# Altium PCB Altium_PCB_v03_RAM_ROM_4Plane.pcbdoc
Units mil, origin at the board's own origin, x right, y up, seen from the top; angles counter-clockwise.
Board outline 6299.21 x 6299.21 mil, 4 copper layers (Top Layer, GROUND, 5V, Bottom Layer); 19 components, 42 nets, 129 pads, 0 vias.
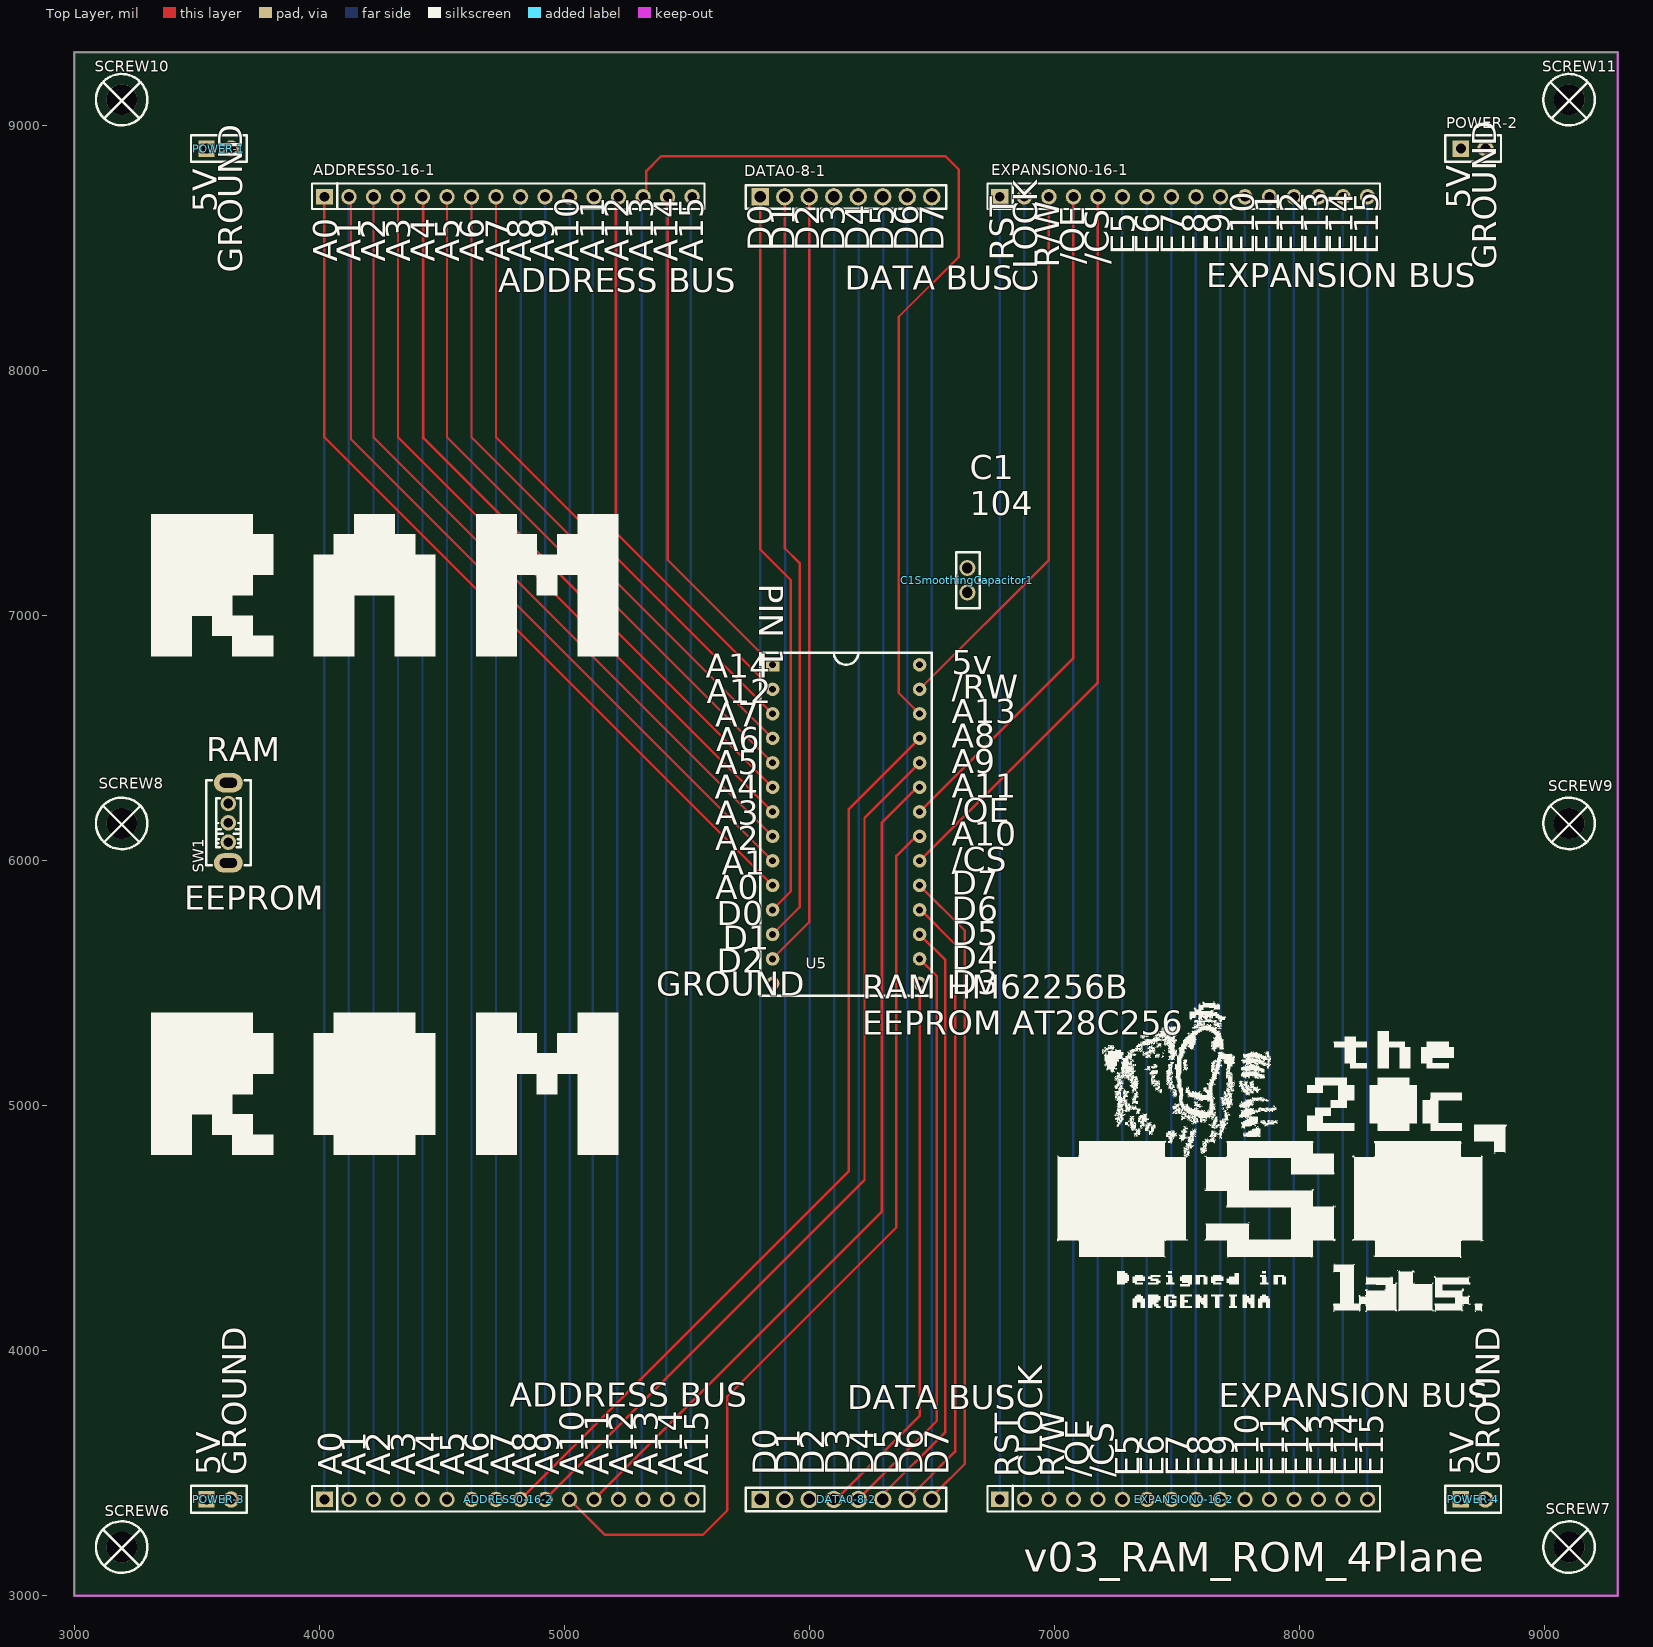
[diagram p0: Top Layer view]
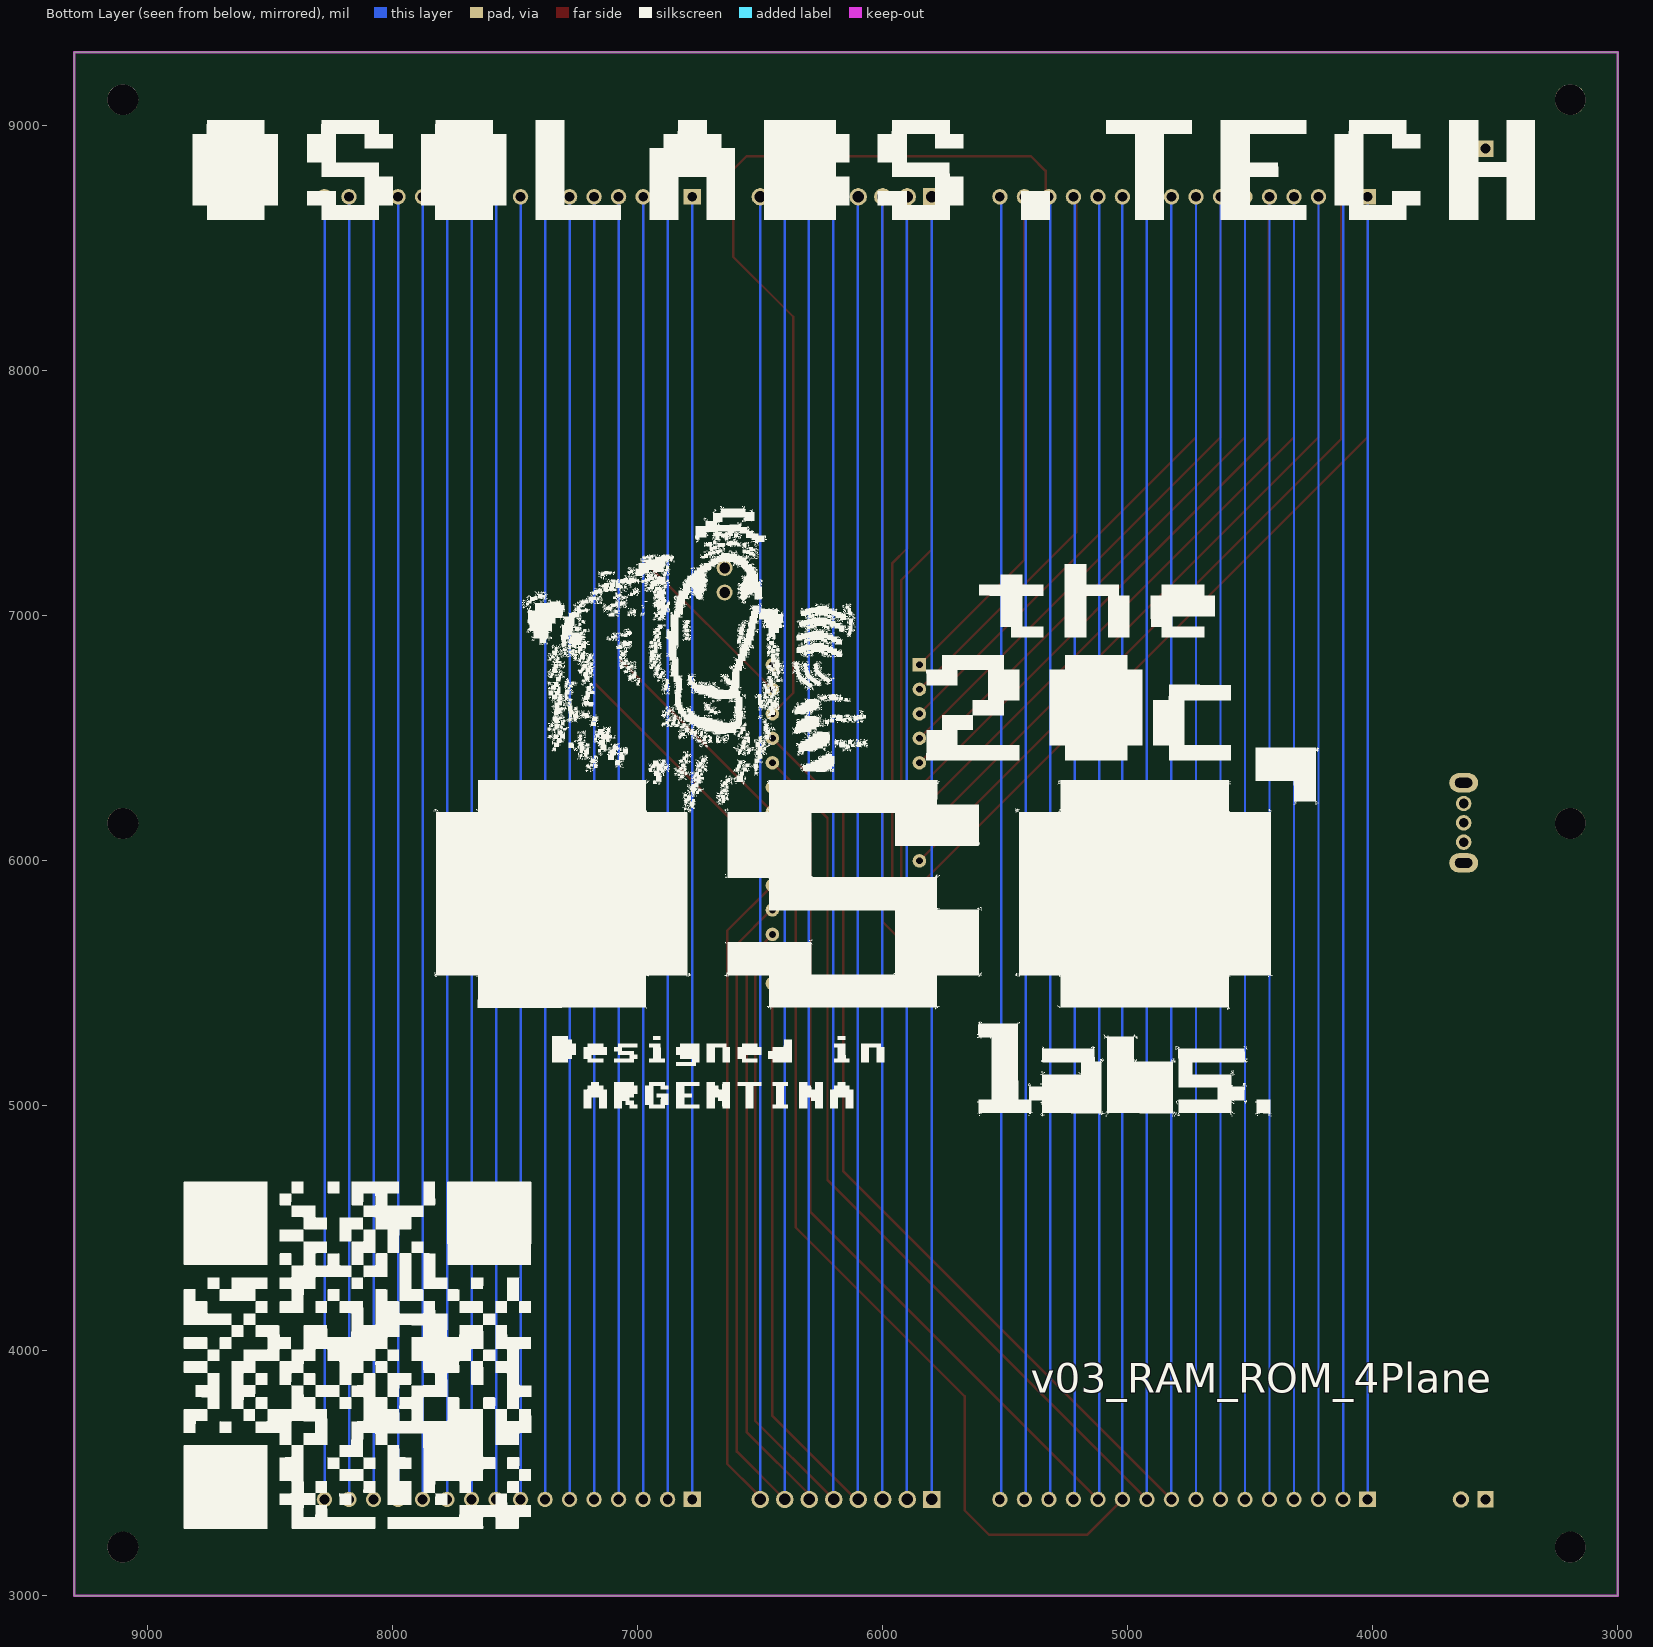
[diagram p1: Bottom Layer view, seen from below]
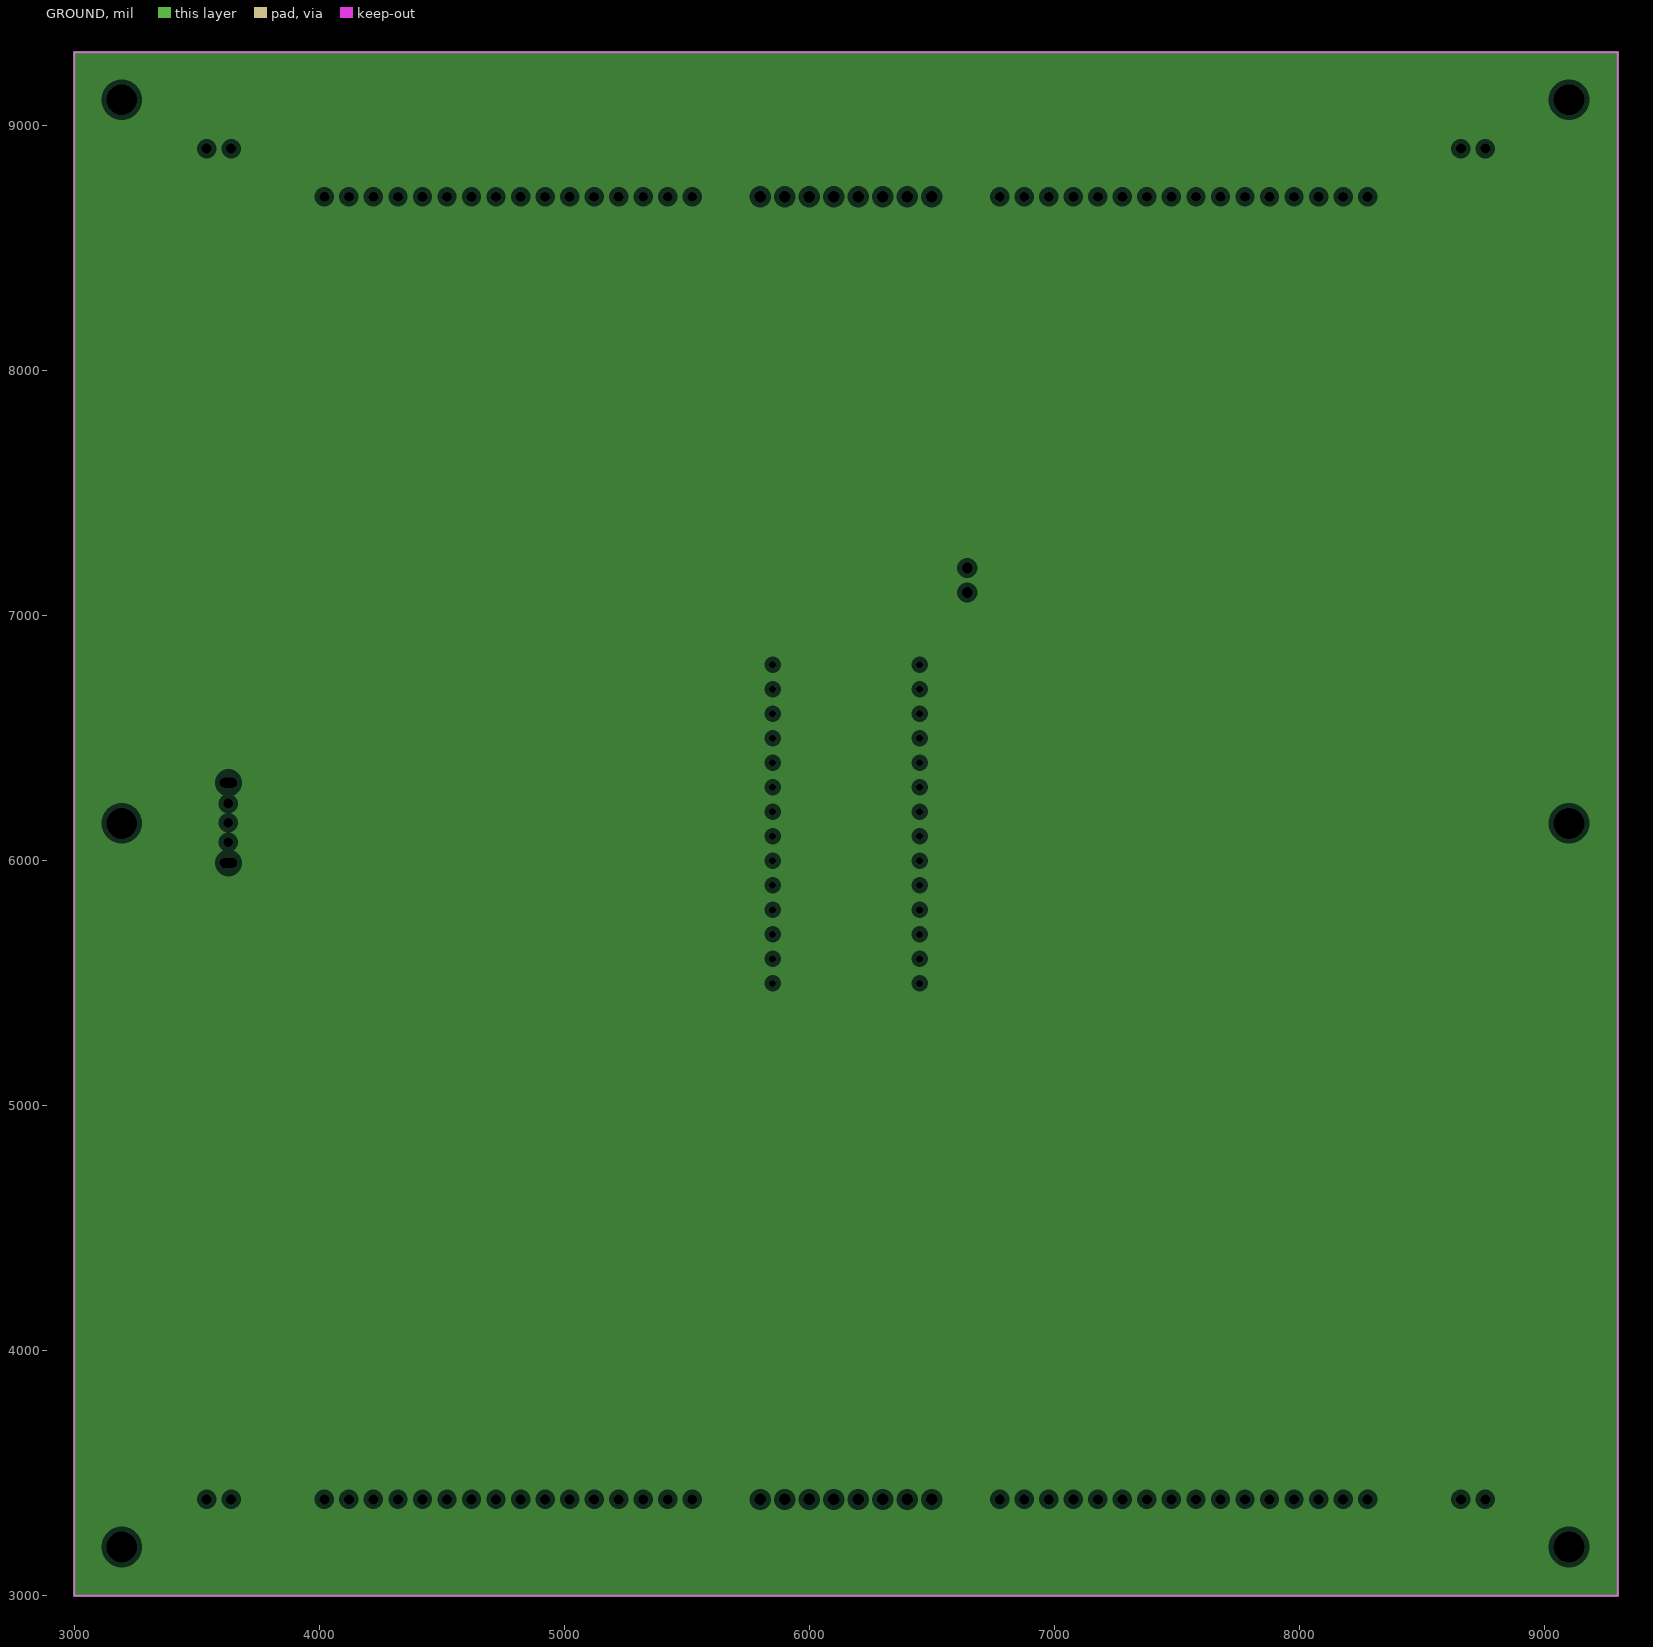
[diagram p2: GROUND, clearances drawn from the general rule]
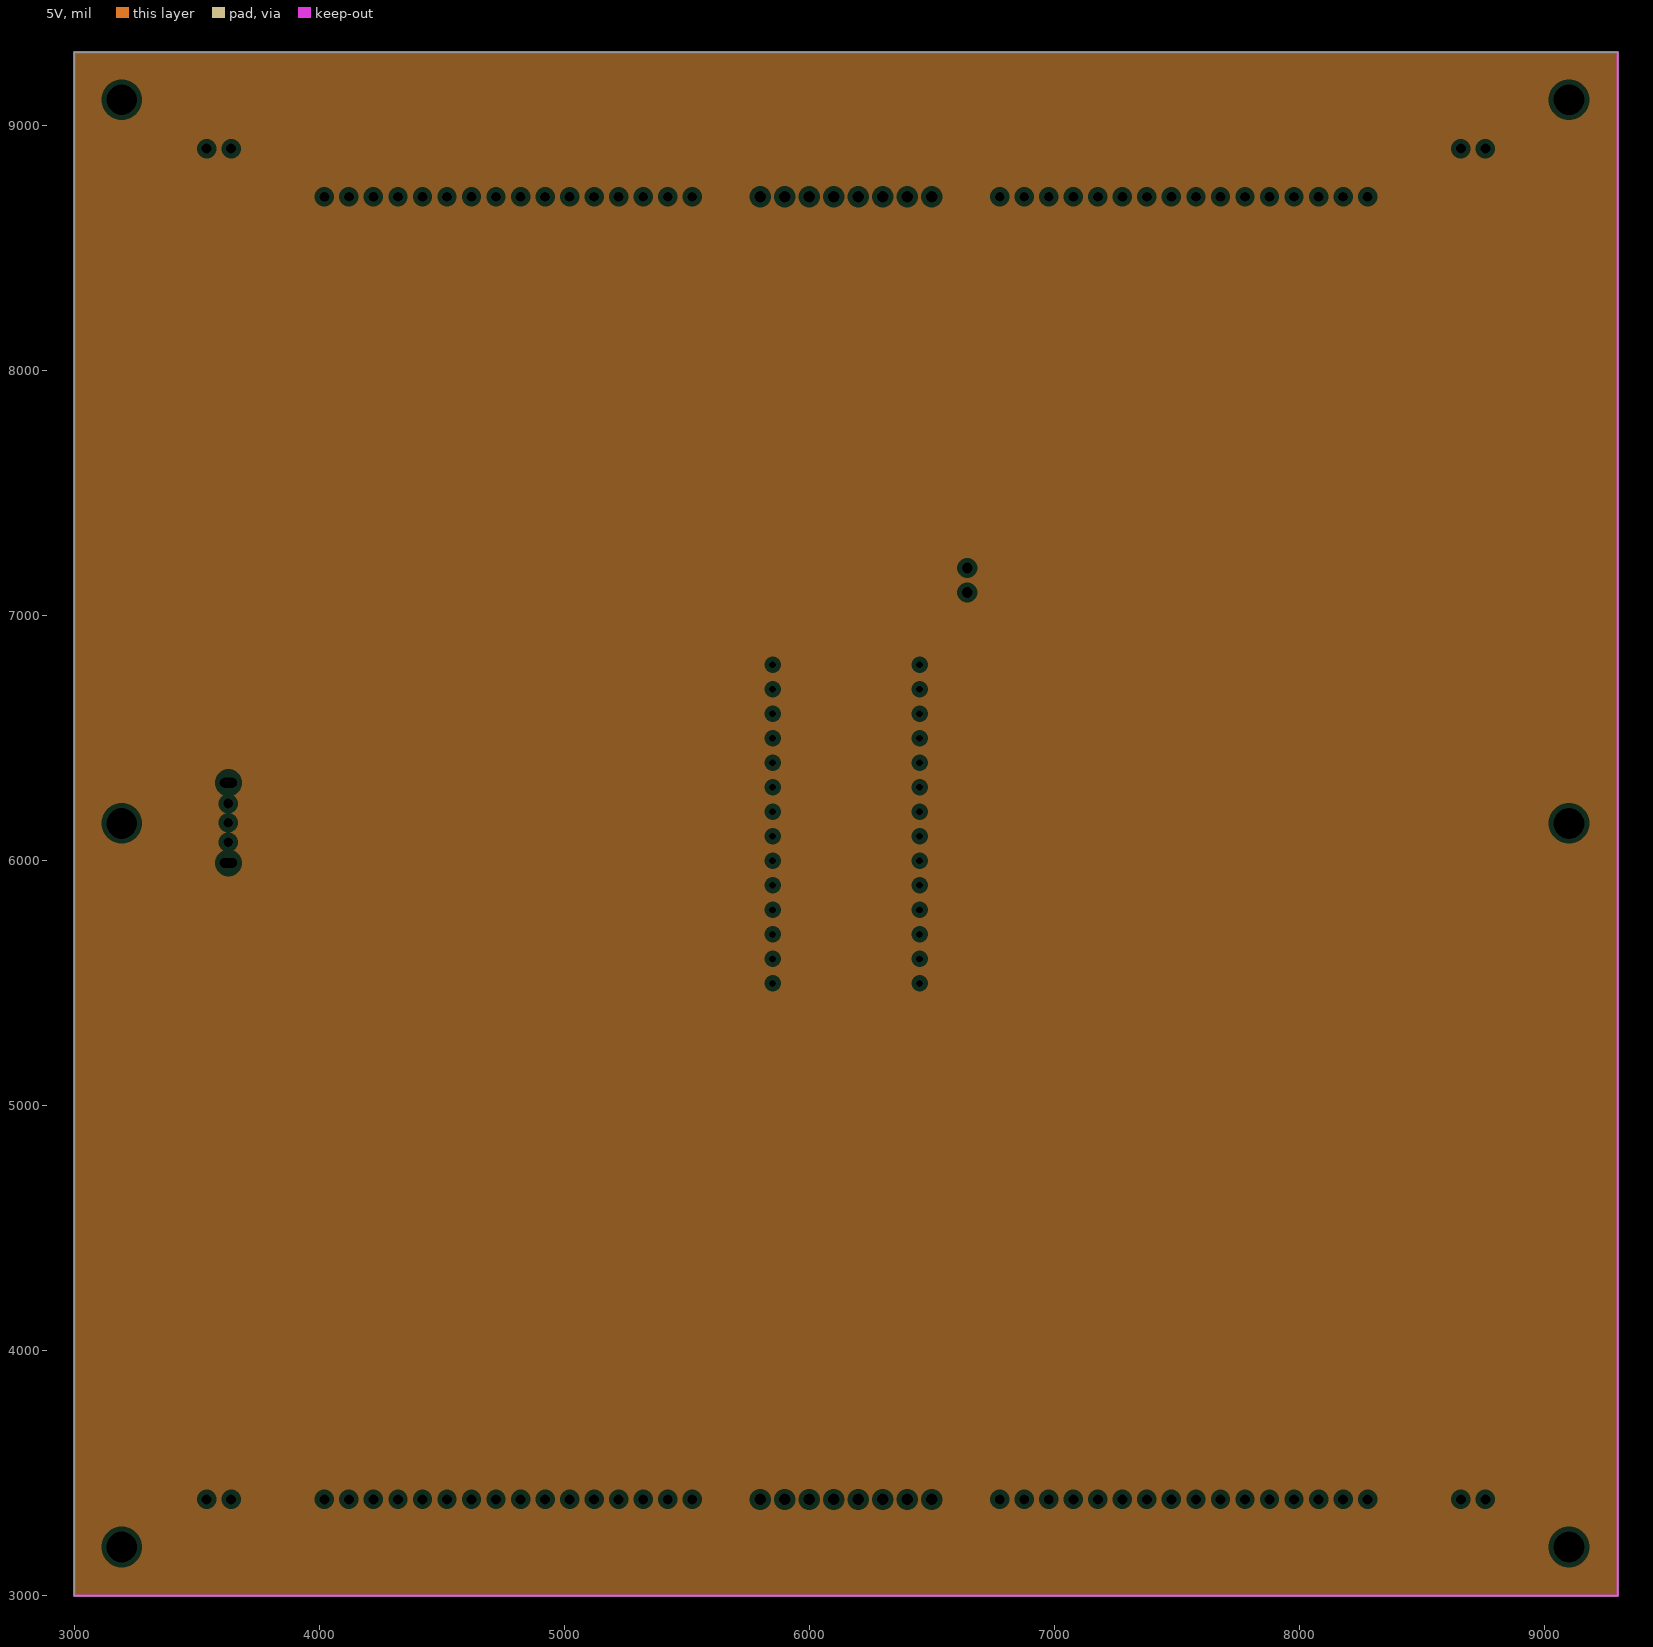
[diagram p3: 5V, clearances drawn from the general rule]

## Layer stack, top to bottom
Top Layer: signal copper (thickness not stored)
Dielectric: dielectric 12.6, FR-4, Dk 4.8
GROUND: plane copper (thickness not stored)
Dielectric: dielectric 12.6, FR-4, Dk 4.8
5V: plane copper (thickness not stored)
Dielectric: dielectric 12.6, FR-4, Dk 4.8
Bottom Layer: signal copper (thickness not stored)

## Board outline
3000,9299.21 9299.21,9299.21 9299.21,3000 3000,3000

## Design rules (kind name [scope] priority, off if disabled: settings)
BoardOutlineClearance copperThickness1oz [All] p0: genericclearance=10 ignorepadtopadclearanceinfootprint=FALSE except(0: Arc-SplitContinuation Track-SplitContinuation SMDPad-SplitContinuation THPad-SplitContinuation Via-SplitContinuation Fill-SplitContinuation Poly-SplitContinuation Region-SplitContinuation Text-SplitContinuation; 6: SMDPad-CutoutEdge THPad-CutoutEdge Via-CutoutEdge Fill-CutoutEdge Region-CutoutEdge; 11.8: Track-OutlineEdge SMDPad-OutlineEdge THPad-OutlineEdge Via-OutlineEdge Fill-OutlineEdge Region-OutlineEdge Poly-OutlineEdge Text-OutlineEdge Track-CutoutEdge)
BoardOutlineClearance copperThickness2oz [All] p0: genericclearance=10 ignorepadtopadclearanceinfootprint=FALSE except(0: Arc-SplitContinuation Track-SplitContinuation SMDPad-SplitContinuation THPad-SplitContinuation Via-SplitContinuation Fill-SplitContinuation Poly-SplitContinuation Region-SplitContinuation Text-SplitContinuation; 6: SMDPad-CutoutEdge THPad-CutoutEdge Via-CutoutEdge Fill-CutoutEdge Region-CutoutEdge; 11.8: Track-OutlineEdge SMDPad-OutlineEdge THPad-OutlineEdge Via-OutlineEdge Fill-OutlineEdge Region-OutlineEdge Poly-OutlineEdge Text-OutlineEdge Track-CutoutEdge)
Clearance copperThickness1oz [(InNet('A0') OR InNet('A1') OR InNet('A2') OR InNet('A3') OR InNet('A4') OR InNet('A5') OR InNet('A6') OR InNet('A7') OR InNet('A8') OR InNet('A9') OR InNet('A10') OR InNet('A11') OR InNet('A12') OR InNet('A13') OR InNet('A14') OR InNet('A15') OR InNet('RST') OR InNet('CLOCK') OR InNet('RW') OR InNet('OE') OR InNet('CS') OR InNet('E5') OR InNet('E6') OR InNet('E7') OR InNet('E8') OR InNet('E9') OR InNet('E10') OR InNet('E11') OR InNet('E12') OR InNet('E13') OR InNet('E14') OR InNet('E15') OR InNet('5V') OR InNet('GROUND') OR InNet('D0') OR InNet('D1') OR InNet('D2') OR InNet('D3') OR InNet('D4') OR InNet('D5') OR InNet('D6') OR InNet('D7'))] p1: gap=7 ignorepadtopadclearanceinfootprint=FALSE except(4: Track-Track; 6: Track-SMDPad SMDPad-SMDPad Track-THPad SMDPad-THPad THPad-THPad Track-Via SMDPad-Via THPad-Via Via-Via Track-Fill SMDPad-Fill THPad-Fill Via-Fill Fill-Fill SMDPad-Region THPad-Region Via-Region Fill-Region Region-Region Track-Poly SMDPad-Poly THPad-Poly Via-Poly Fill-Poly Poly-Poly Track-Text SMDPad-Text THPad-Text Via-Text Fill-Text Region-Text Poly-Text Text-Text Track-Hole SMDPad-Hole THPad-Hole Via-Hole Fill-Hole Region-Hole Poly-Hole Text-Hole; 11.8: Track-Region Region-Poly Track-Sheet SMDPad-Sheet THPad-Sheet Via-Sheet Fill-Sheet Region-Sheet Poly-Sheet Text-Sheet Sheet-Hole)
Clearance copperThickness2oz [All] p1: gap=7 ignorepadtopadclearanceinfootprint=FALSE except(6: Track-SMDPad SMDPad-SMDPad Track-THPad SMDPad-THPad THPad-THPad Track-Via SMDPad-Via THPad-Via Via-Via Track-Fill SMDPad-Fill THPad-Fill Via-Fill Fill-Fill SMDPad-Region THPad-Region Via-Region Fill-Region Region-Region Track-Poly SMDPad-Poly THPad-Poly Via-Poly Fill-Poly Poly-Poly Track-Text SMDPad-Text THPad-Text Via-Text Fill-Text Region-Text Poly-Text Text-Text Track-Hole SMDPad-Hole THPad-Hole Via-Hole Fill-Hole Region-Hole Poly-Hole Text-Hole; 8: Track-Track; 11.8: Track-Region Region-Poly Track-Sheet SMDPad-Sheet THPad-Sheet Via-Sheet Fill-Sheet Region-Sheet Poly-Sheet Text-Sheet Sheet-Hole)
DiffPairsRouting differentialPair [All] p1: maxuncoupledlength=10 minlimit=6 maxlimit=6 mostfreqgap=6 toplayer_minwidth=5 toplayer_prefwidth=10 toplayer_maxwidth=100 bottomlayer_minwidth=5 bottomlayer_prefwidth=10 bottomlayer_maxwidth=100
PasteMaskExpansion pasteMaskExpansion [All] p1: expansion=0
PlaneConnect innerPlane [All] p1: planeconnectstyle=Relief reliefexpansion=20 reliefentries=4 reliefconductorwidth=10 reliefairgap=10
PolygonConnect copperRegion [All] p1: connectstyle=Relief reliefentries=4 reliefconductorwidth=10 polygonreliefangle="90 Angle" airgapwidth=10
RoutingVias viaSize [All] p1: viastyle="Through Hole" holewidth=12.0078 minholewidth=11.811 maxholewidth=248.0314 width=24.0158 minwidth=19.685 maxwidth=393.7008
SolderMaskExpansion solderMaskExpansion [All] p1: useseparateexpansions=TRUE expansion=2 expansionbottom=2
Width copperThickness1oz [All] p1: maxlimit=100 minlimit=5 preferedwidth=10
Width copperThickness2oz [All] p1: maxlimit=100 minlimit=8 preferedwidth=10

## Components (designator, comment, footprint, x,y, rotation, side; value= is the part's Value field where it differs from the comment)
ADDRESS0-16-1 "PM254-1-16-Z-8.5" HDR-TH_16P-P2.54-V-F-A 4771.65,8708.66 r0 top
ADDRESS0-16-2 "PM254-1-16-Z-8.5" HDR-TH_16P-P2.54-V-F-A 4771.65,3393.7 r0 top
C1SmoothingCapacitor1 "CC1H104ZA1ED3F5P1100" CAP-TH_L5.8-W2.4-P2.54-D0.6 6645,7144.21 r90 top
DATA0-8-1 "2.54-1*8P母环保" HDR-TH_8P-P2.54-V-F-1 6149.61,8708.66 r0 top
DATA0-8-2 "2.54-1*8P母环保" HDR-TH_8P-P2.54-V-F-1 6149.61,3393.7 r0 top
EXPANSION0-16-1 "PM254-1-16-Z-8.5" HDR-TH_16P-P2.54-V-F-A 7527.56,8708.66 r0 top
EXPANSION0-16-2 "PM254-1-16-Z-8.5" HDR-TH_16P-P2.54-V-F-A 7527.56,3393.7 r0 top
POWER-1 "2.54-1*2P母" HDR-TH_2P-P2.54-V-F 3590.55,8905.51 r0 top
POWER-2 "2.54-1*2P母" HDR-TH_2P-P2.54-V-F 8708.66,8905.51 r0 top
POWER-3 "2.54-1*2P母" HDR-TH_2P-P2.54-V-F 3590.55,3393.7 r0 top
POWER-4 "2.54-1*2P母" HDR-TH_2P-P2.54-V-F 8708.66,3393.7 r0 top
SCREW6 "Screw-Hole-M3" Screw-Hole-M3 3196.85,3196.85 r0 top
SCREW7 "Screw-Hole-M3" Screw-Hole-M3 9102.36,3196.85 r0 top
SCREW8 "Screw-Hole-M3" Screw-Hole-M3 3196.85,6149.61 r0 top
SCREW9 "Screw-Hole-M3" Screw-Hole-M3 9102.36,6149.61 r0 top
SCREW10 "Screw-Hole-M3" Screw-Hole-M3 3196.85,9102.36 r0 top
SCREW11 "Screw-Hole-M3" Screw-Hole-M3 9102.36,9102.36 r0 top
SW1 "SS12D07VG4 087" SW-TH_SS12D07VG4 3629.48,6154.41 r90 top
U5 "DS1009-28AT1WX-0A2" DIP-28_L35.6-W17.8-P2.54-LS15.2-BL 6150,6149.21 r270 top

## Footprints (in the part's own frame and the unit in brackets; to place one, negate y for a bottom-side part, rotate by r counter-clockwise, add the part's x,y. Pads: shape width x height; smd on the part's side, far side on the other; paste and mask are expansions set on the pad)
CAP-TH_L5.8-W2.4-P2.54-D0.6 [mm]
  round 1.65 hole 1.1: 1(-1.27,0) 2(1.27,0)
  silkscreen extent -2.92,-1.27 2.92,1.14
DIP-28_L35.6-W17.8-P2.54-LS15.2-BL [mm]
  rect 1.4x1.4 hole 0.7: 1(-16.51,-7.62)
  round 1.4 hole 0.7: 2(-13.97,-7.62) 3(-11.43,-7.62) 4(-8.89,-7.62) 5(-6.35,-7.62) 6(-3.81,-7.62) 7(-1.27,-7.62) 8(1.27,-7.62) 9(3.81,-7.62) 10(6.35,-7.62) 11(8.89,-7.62) 12(11.43,-7.62) 13(13.97,-7.62) 14(16.51,-7.62) 15(16.51,7.62) 16(13.97,7.62) 17(11.43,7.62) 18(8.89,7.62) 19(6.35,7.62) 20(3.81,7.62) 21(1.27,7.62) 22(-1.268,7.62) 23(-3.81,7.62) 24(-6.35,7.62) 25(-8.89,7.62) 26(-11.43,7.62) 27(-13.97,7.62) 28(-16.51,7.62)
  silkscreen extent -17.78,-8.89 17.78,8.89
HDR-TH_2P-P2.54-V-F [mm]
  rect 1.7x1.7 hole 1: 1(-1.27,0)
  round 1.7 hole 1: 2(1.27,0)
  silkscreen extent -2.88,-1.39 2.88,1.4
HDR-TH_8P-P2.54-V-F-1 [mm]
  rect 1.8x1.8 hole 1.2: 1(-8.89,0)
  round 1.8 hole 1.2: 2(-6.35,0) 3(-3.81,0) 4(-1.27,0) 5(1.27,0) 6(3.81,0) 7(6.35,0) 8(8.89,0)
  silkscreen extent -10.41,-1.22 10.41,1.22
HDR-TH_16P-P2.54-V-F-A [mm]
  rect 1.8x1.6 hole 1: 1(-19.05,0)
  round 1.6 hole 1: 2(-16.51,0) 3(-13.97,0) 4(-11.43,0) 5(-8.89,0) 6(-6.35,0) 7(-3.81,0) 8(-1.27,0) 9(1.27,0) 10(3.81,0) 11(6.35,0) 12(8.89,0) 13(11.43,0) 14(13.97,0) 15(16.51,0) 16(19.05,0)
  silkscreen extent -20.32,-1.27 20.32,1.4
Screw-Hole-M3 [mil]
  round 126 hole 126: 1(-2.5,2.5)
  silkscreen extent -107,-102 102,107
SW-TH_SS12D07VG4 [mm]
  round 1.6 hole 1: 1(-2,0) 2(0,0) 3(2,0)
  oval 2x3 hole 1 slot 1.8 at 90 deg: 4(4.15,0) 5(-4.15,0)
  silkscreen extent -4.4,-2.3 4.4,2.3

## Nets (pads, with @x,y where several pads share a name; then routed paths per layer and width w, separated by ;. In a path a pad name is that pad's centre, name@x,y a point inside that pad or via, vN(x,y) a via of type N, cw(c..) or ccw(c..) an arc to the next point about the centre after c; other vN are vias at no path point)
5V: C1SmoothingCapacitor1.1 POWER-1.1 POWER-2.1 POWER-3.1 POWER-4.1 U5.28
A0: ADDRESS0-16-1.1 ADDRESS0-16-2.1 U5.10 | length 8881.2
  Top Layer w10: ADDRESS0-16-1.1 4021.65,7727.56 U5.10@5849.61,5899.61
  Bottom Layer w10: ADDRESS0-16-2.1 ADDRESS0-16-1.1
A1: ADDRESS0-16-1.2 ADDRESS0-16-2.2 U5.9 | length 8739.8
  Top Layer w10: ADDRESS0-16-1.2 4130,8700.31 4130,7719.21 U5.9@5849.61,5999.61
  Bottom Layer w10: ADDRESS0-16-2.2 ADDRESS0-16-1.2
A2: ADDRESS0-16-1.3 ADDRESS0-16-2.3 U5.8 | length 8598.3
  Top Layer w10: ADDRESS0-16-1.3 4221.65,7727.56 U5.8@5849.61,6099.61
  Bottom Layer w10: ADDRESS0-16-2.3 ADDRESS0-16-1.3
A3: ADDRESS0-16-1.4 ADDRESS0-16-2.4 U5.7 | length 8456.9
  Top Layer w10: ADDRESS0-16-1.4 4321.65,7727.56 U5.7@5849.61,6199.61
  Bottom Layer w10: ADDRESS0-16-2.4 ADDRESS0-16-1.4
A4: ADDRESS0-16-1.5 ADDRESS0-16-2.5 U5.6 | length 8315.5
  Top Layer w10: ADDRESS0-16-1.5 4425,8705.31 4425,7724.21 U5.6@5849.61,6299.61
  Bottom Layer w10: ADDRESS0-16-2.5 ADDRESS0-16-1.5
A5: ADDRESS0-16-1.6 ADDRESS0-16-2.6 U5.5 | length 8174.1
  Top Layer w10: ADDRESS0-16-1.6 4521.65,7727.56 U5.5@5849.61,6399.61
  Bottom Layer w10: ADDRESS0-16-2.6 ADDRESS0-16-1.6
A6: ADDRESS0-16-1.7 ADDRESS0-16-2.7 U5.4 | length 8032.7
  Top Layer w10: ADDRESS0-16-1.7 4621.65,7727.56 U5.4@5849.61,6499.61
  Bottom Layer w10: ADDRESS0-16-2.7 ADDRESS0-16-1.7
A7: ADDRESS0-16-1.8 ADDRESS0-16-2.8 U5.3 | length 7891.2
  Top Layer w10: ADDRESS0-16-1.8 4721.65,7727.56 U5.3@5849.61,6599.61
  Bottom Layer w10: ADDRESS0-16-2.8 ADDRESS0-16-1.8
A8: ADDRESS0-16-1.9 ADDRESS0-16-2.9 U5.25 | length 9095
  Top Layer w10: ADDRESS0-16-2.9 6160,4732.05 6160,6209.21 U5.25
  Bottom Layer w10: ADDRESS0-16-2.9 ADDRESS0-16-1.9
A9: ADDRESS0-16-1.10 ADDRESS0-16-2.10 U5.24 | length 8953.5
  Top Layer w10: ADDRESS0-16-2.10 6225,4697.05 6225,6174.21 U5.24
  Bottom Layer w10: ADDRESS0-16-2.10 ADDRESS0-16-1.10
A10: ADDRESS0-16-1.11 ADDRESS0-16-2.11 U5.21 | length 9143.5
  Top Layer w10: ADDRESS0-16-2.11 5166.14,3249.21 5565,3249.21 5665,3349.21 5665,3814.21 6355,4504.21 6355,6019.21 6435,6099.21 U5.21
  Bottom Layer w10: ADDRESS0-16-2.11 ADDRESS0-16-1.11
A11: ADDRESS0-16-1.12 ADDRESS0-16-2.12 U5.23 | length 8776.5
  Top Layer w10: ADDRESS0-16-2.12 6295,4567.05 6295,6154.21 6440,6299.21 U5.23
  Bottom Layer w10: ADDRESS0-16-2.12@5116.65,3383.7 ADDRESS0-16-1.12@5116.65,8698.66
A12: ADDRESS0-16-1.13 ADDRESS0-16-2.13 U5.2 | length 7593.8
  Top Layer w10: ADDRESS0-16-1.13 5210,8697.01 5210,7339.21 U5.2@5849.61,6699.61
  Bottom Layer w10: ADDRESS0-16-2.13@5216.65,3383.7 ADDRESS0-16-1.13@5216.65,8698.66
A13: ADDRESS0-16-1.14 ADDRESS0-16-2.14 U5.26 | length 9105.4
  Top Layer w10: ADDRESS0-16-1.14 5335,8722.01 5335,8814.21 5395,8874.21 6555,8874.21 6610,8819.21 6610,8464.21 6365,8219.21 6365,6684.21 U5.26
  Bottom Layer w10: ADDRESS0-16-2.14@5316.65,3383.7 ADDRESS0-16-1.14@5316.65,8698.66
A14: ADDRESS0-16-1.15 ADDRESS0-16-2.15 U5.1 | length 7401.3
  Top Layer w10: ADDRESS0-16-1.15 5421.65,7227.56 U5.1@5849.61,6799.61
  Bottom Layer w10: ADDRESS0-16-2.15@5416.65,3383.7 ADDRESS0-16-1.15@5416.65,8698.66
A15: ADDRESS0-16-1.16 ADDRESS0-16-2.16 | length 5315
  Bottom Layer w10: ADDRESS0-16-2.16@5516.65,3383.7 ADDRESS0-16-1.16@5516.65,8698.66
CLOCK: EXPANSION0-16-1.2 EXPANSION0-16-2.2 | length 5315
  Bottom Layer w10: EXPANSION0-16-2.2@6876.65,3393.7 EXPANSION0-16-1.2@6876.65,8708.66
CS: EXPANSION0-16-1.5 EXPANSION0-16-2.5 U5.20 | length 8325.8
  Top Layer w10: U5.20 7177.56,6726.77 EXPANSION0-16-1.5
  Bottom Layer w10: EXPANSION0-16-2.5@7176.65,3393.7 EXPANSION0-16-1.5@7176.65,8708.66
D0: DATA0-8-1.1 DATA0-8-2.1 U5.11 | length 8307.2
  Top Layer w10: DATA0-8-1.1 5799.61,7269.61 5925,7144.21 5925,5875 U5.11@5849.61,5799.61
  Bottom Layer w10: DATA0-8-2.1 DATA0-8-1.1
D1: DATA0-8-1.2 DATA0-8-2.2 U5.12 | length 8394.8
  Top Layer w10: U5.12@5849.61,5699.61 5960,5810 5960,7214.21 5899.61,7274.61 DATA0-8-1.2
  Bottom Layer w10: DATA0-8-2.2@5901.65,3393.7 DATA0-8-1.2@5901.65,8708.66
D2: DATA0-8-1.3 DATA0-8-2.3 U5.13 | length 8486.1
  Top Layer w10: U5.13@5849.61,5599.61 5999.61,5749.61 DATA0-8-1.3
  Bottom Layer w10: DATA0-8-2.3@6001.65,3393.7 DATA0-8-1.3@6001.65,8708.66
D3: DATA0-8-1.4 DATA0-8-2.4 U5.15 | length 7547.2
  Top Layer w10: DATA0-8-2.4@6119.61,3403.82 6450,3734.21 U5.15
  Bottom Layer w10: DATA0-8-2.4@6101.65,3393.7 DATA0-8-1.4@6101.65,8708.66
D4: DATA0-8-1.5 DATA0-8-2.5 U5.16 | length 7653.8
  Top Layer w10: DATA0-8-2.5@6219.61,3413.82 6520,3714.21 6520,5529.21 U5.16
  Bottom Layer w10: DATA0-8-2.5@6201.65,3393.7 DATA0-8-1.5@6201.65,8708.66
D5: DATA0-8-1.6 DATA0-8-2.6 U5.17 | length 7769.8
  Top Layer w10: DATA0-8-2.6 6299.61,3413.82 6555,3669.21 6555,5594.21 U5.17
  Bottom Layer w10: DATA0-8-2.6@6301.65,3393.7 DATA0-8-1.6@6301.65,8708.66
D6: DATA0-8-1.7 DATA0-8-2.7 U5.18 | length 7864.4
  Top Layer w10: DATA0-8-2.7 6595,3589.09 6595,5659.21 6455,5799.21 U5.18
  Bottom Layer w10: DATA0-8-2.7 DATA0-8-1.7
D7: DATA0-8-1.8 DATA0-8-2.8 U5.19 | length 7914.8
  Top Layer w10: U5.19 6635,5714.21 6635,3539.21 6519.61,3423.82
  Bottom Layer w10: DATA0-8-2.8 DATA0-8-1.8
E5: EXPANSION0-16-1.6 EXPANSION0-16-2.6 | length 5315
  Bottom Layer w10: EXPANSION0-16-2.6@7276.65,3393.7 EXPANSION0-16-1.6@7276.65,8708.66
E6: EXPANSION0-16-1.7 EXPANSION0-16-2.7 | length 5315
  Bottom Layer w10: EXPANSION0-16-2.7@7376.65,3393.7 EXPANSION0-16-1.7@7376.65,8708.66
E7: EXPANSION0-16-1.8 EXPANSION0-16-2.8 | length 5315
  Bottom Layer w10: EXPANSION0-16-2.8@7476.65,3393.7 EXPANSION0-16-1.8@7476.65,8708.66
E8: EXPANSION0-16-1.9 EXPANSION0-16-2.9 | length 5315
  Bottom Layer w10: EXPANSION0-16-2.9@7576.65,3393.7 EXPANSION0-16-1.9@7576.65,8708.66
E9: EXPANSION0-16-1.10 EXPANSION0-16-2.10 | length 5315
  Bottom Layer w10: EXPANSION0-16-2.10@7676.65,3393.7 EXPANSION0-16-1.10@7676.65,8708.66
E10: EXPANSION0-16-1.11 EXPANSION0-16-2.11 | length 5315
  Bottom Layer w10: EXPANSION0-16-2.11@7776.65,3393.7 EXPANSION0-16-1.11@7776.65,8708.66
E11: EXPANSION0-16-1.12 EXPANSION0-16-2.12 | length 5315
  Bottom Layer w10: EXPANSION0-16-2.12@7876.65,3393.7 EXPANSION0-16-1.12@7876.65,8708.66
E12: EXPANSION0-16-1.13 EXPANSION0-16-2.13 | length 5315
  Bottom Layer w10: EXPANSION0-16-2.13@7976.65,3393.7 EXPANSION0-16-1.13@7976.65,8708.66
E13: EXPANSION0-16-1.14 EXPANSION0-16-2.14 | length 5315
  Bottom Layer w10: EXPANSION0-16-2.14@8076.65,3393.7 EXPANSION0-16-1.14@8076.65,8708.66
E14: EXPANSION0-16-1.15 EXPANSION0-16-2.15 | length 5315
  Bottom Layer w10: EXPANSION0-16-2.15@8176.65,3393.7 EXPANSION0-16-1.15@8176.65,8708.66
E15: EXPANSION0-16-1.16 EXPANSION0-16-2.16 | length 5315
  Bottom Layer w10: EXPANSION0-16-2.16@8276.65,3393.7 EXPANSION0-16-1.16@8276.65,8708.66
GROUND: C1SmoothingCapacitor1.2 POWER-1.2 POWER-2.2 POWER-3.2 POWER-4.2 U5.14
OE: EXPANSION0-16-1.4 EXPANSION0-16-2.4 U5.22 | length 8084.4
  Top Layer w10: U5.22 7077.56,6826.71 EXPANSION0-16-1.4
  Bottom Layer w10: EXPANSION0-16-2.4@7076.65,3393.7 EXPANSION0-16-1.4@7076.65,8708.66
RST: EXPANSION0-16-1.1 EXPANSION0-16-2.1 | length 5315
  Bottom Layer w10: EXPANSION0-16-2.1@6776.65,3393.7 EXPANSION0-16-1.1@6776.65,8708.66
RW: EXPANSION0-16-1.3 EXPANSION0-16-2.3 U5.27 | length 7542.9
  Top Layer w10: U5.27 6977.56,7226.77 EXPANSION0-16-1.3
  Bottom Layer w10: EXPANSION0-16-2.3@6976.65,3393.7 EXPANSION0-16-1.3@6976.65,8708.66
pads on no net: SCREW6.1 SCREW7.1 SCREW8.1 SCREW9.1 SCREW10.1 SCREW11.1 SW1.1 SW1.2 SW1.3 SW1.4 SW1.5

## Keep-outs
Board Outline Layer:
  the board outline again, w10

## Silkscreen, mask and mechanical layers (free items; w line width, h text height)
Top Silkscreen Layer:
  drawing of 2970 lines, arcs and shapes, not listed
  text "5V" at 8696.71,8660.61 h98.43 r90
  text "5V" at 3581.71,8645.61 h98.43 r90
  text "D0" at 5846.09,8487.31 h98.43 r90
  text "D1" at 5941.09,8487.31 h98.43 r90
  text "D2" at 6041.09,8487.31 h98.43 r90
  text "D3" at 6143.59,8487.31 h98.43 r90
  text "D4" at 6243.59,8487.31 h98.43 r90
  text "D5" at 6343.59,8487.31 h98.43 r90
  text "D6" at 6443.59,8487.31 h98.43 r90
  text "D7" at 6548.59,8487.31 h98.43 r90
  text "E5" at 7326.94,8472.61 h98.43 r90
  text "E6" at 7426.94,8472.61 h98.43 r90
  text "E7" at 7531.94,8472.61 h98.43 r90
  text "E8" at 7619.44,8472.61 h98.43 r90
  text "E9" at 7714.44,8472.61 h98.43 r90
  text "E10" at 7814.44,8472.61 h98.43 r90
  text "E11" at 7916.94,8472.61 h98.43 r90
  text "E12" at 8016.94,8472.61 h98.43 r90
  text "E13" at 8116.94,8472.61 h98.43 r90
  text "E14" at 8216.94,8472.61 h98.43 r90
  text "E15" at 8321.94,8472.61 h98.43 r90
  text "RST" at 6835,8447.11 h98.43 r90
  text "A0" at 4074.84,8442.81 h98.43 r90
  text "A1" at 4169.84,8442.81 h98.43 r90
  text "A2" at 4269.84,8442.81 h98.43 r90
  text "A3" at 4372.34,8442.81 h98.43 r90
  text "A4" at 4472.34,8442.81 h98.43 r90
  text "A5" at 4572.34,8442.81 h98.43 r90
  text "A6" at 4672.34,8442.81 h98.43 r90
  text "A7" at 4777.34,8442.81 h98.43 r90
  text "A8" at 4864.84,8442.81 h98.43 r90
  text "A9" at 4959.84,8442.81 h98.43 r90
  text "A10" at 5059.84,8442.81 h98.43 r90
  text "A11" at 5162.34,8442.81 h98.43 r90
  text "A12" at 5262.34,8442.81 h98.43 r90
  text "A13" at 5362.34,8442.81 h98.43 r90
  text "A14" at 5462.34,8442.81 h98.43 r90
  text "A15" at 5567.34,8442.81 h98.43 r90
  text "/OE" at 7121.94,8432.91 h98.43 r90
  text "/CS" at 7221.94,8433.01 h98.43 r90
  text "R/W" at 7019.44,8418.81 h98.43 r90
  text "GROUND" at 8801.71,8413.41 h98.43 r90
  text "GROUND" at 3686.71,8398.41 h98.43 r90
  text "EXPANSION BUS" at 7620,8339.21 h98.43
  text "DATA BUS" at 6145,8329.21 h98.43
  text "ADDRESS BUS" at 4730,8319.21 h98.43
  text "CLOCK" at 6930,8319.21 h98.43 r90
  text "C1 / 104" at 6655,7409.21 h98.43
  text "PIN 1" at 5795,7129.21 h98.43 r270
  text "5v" at 6580.92,6760.81 h98.43
  text "A14" at 5578.19,6747.08 h98.43
  text "/RW" at 6580.92,6660.81 h98.43
  text "A12" at 5580.99,6642.08 h98.43
  text "A13" at 6580.92,6560.81 h98.43
  text "A7" at 5616.69,6547.08 h98.43
  text "A8" at 6580.92,6460.81 h98.43
  text "A6" at 5619.49,6447.08 h98.43
  text "RAM" at 3539.52,6405.73 h98.43
  text "A9" at 6580.92,6355.81 h98.43
  text "A5" at 5616.69,6352.08 h98.43
  text "A11" at 6580.92,6255.81 h98.43
  text "A4" at 5613.89,6252.08 h98.43
  text "/OE" at 6580.92,6155.81 h98.43
  text "A3" at 5616.69,6147.08 h98.43
  text "A10" at 6580.92,6060.81 h98.43
  text "A2" at 5616.69,6042.08 h98.43
  text "/CS" at 6580.92,5955.81 h98.43
  text "A1" at 5642.09,5942.08 h98.43
  text "D7" at 6580.92,5860.81 h98.43
  text "A0" at 5616.69,5842.08 h98.43
  text "EEPROM" at 3449.52,5800.73 h98.43
  text "D6" at 6580.92,5755.81 h98.43
  text "D0" at 5622.29,5737.08 h98.43
  text "D5" at 6580.92,5655.81 h98.43
  text "D1" at 5647.69,5637.08 h98.43
  text "D4" at 6580.92,5555.81 h98.43
  text "D2" at 5622.29,5542.08 h98.43
  text "D3" at 6580.92,5455.81 h98.43
  text "GROUND" at 5375.54,5449.09 h98.43
  text "RAM HM62256B / EEPROM AT28C256" at 6215.54,5289.09 h98.43
  text "ADDRESS BUS" at 4776.65,3771.85 h98.43
  text "EXPANSION BUS" at 7670,3769.21 h98.43
  text "DATA BUS" at 6154.61,3761.85 h98.43
  text "5V" at 3596.71,3493.41 h98.43 r90
  text "GROUND" at 3701.71,3493.41 h98.43 r90
  text "A0" at 4094.84,3492.81 h98.43 r90
  text "A1" at 4189.84,3492.81 h98.43 r90
  text "A2" at 4289.84,3492.81 h98.43 r90
  text "A3" at 4392.34,3492.81 h98.43 r90
  text "A4" at 4492.34,3492.81 h98.43 r90
  text "A5" at 4592.34,3492.81 h98.43 r90
  text "A6" at 4692.34,3492.81 h98.43 r90
  text "A7" at 4797.34,3492.81 h98.43 r90
  text "A8" at 4884.84,3492.81 h98.43 r90
  text "A9" at 4979.84,3492.81 h98.43 r90
  text "A10" at 5079.84,3492.81 h98.43 r90
  text "A11" at 5182.34,3492.81 h98.43 r90
  text "A12" at 5282.34,3492.81 h98.43 r90
  text "A13" at 5382.34,3492.81 h98.43 r90
  text "A14" at 5482.34,3492.81 h98.43 r90
  text "A15" at 5587.34,3492.81 h98.43 r90
  text "D0" at 5866.09,3492.31 h98.43 r90
  text "D1" at 5961.09,3492.31 h98.43 r90
  text "D2" at 6061.09,3492.31 h98.43 r90
  text "D3" at 6163.59,3492.31 h98.43 r90
  text "D4" at 6263.59,3492.31 h98.43 r90
  text "D5" at 6363.59,3492.31 h98.43 r90
  text "D6" at 6463.59,3492.31 h98.43 r90
  text "D7" at 6568.59,3492.31 h98.43 r90
  text "5V" at 8711.71,3492.06 h98.43 r90
  text "GROUND" at 8816.71,3492.06 h98.43 r90
  text "E5" at 7346.94,3486.01 h98.43 r90
  text "E6" at 7446.94,3486.01 h98.43 r90
  text "E7" at 7551.94,3486.01 h98.43 r90
  text "E8" at 7639.44,3486.01 h98.43 r90
  text "E9" at 7734.44,3486.01 h98.43 r90
  text "E10" at 7834.44,3486.01 h98.43 r90
  text "E11" at 7936.94,3486.01 h98.43 r90
  text "E12" at 8036.94,3486.01 h98.43 r90
  text "E13" at 8136.94,3486.01 h98.43 r90
  text "E14" at 8236.94,3486.01 h98.43 r90
  text "E15" at 8341.94,3486.01 h98.43 r90
  text "RST" at 6855,3484.21 h98.43 r90
  text "CLOCK" at 6950,3484.21 h98.43 r90
  text "R/W" at 7039.44,3484.21 h98.43 r90
  text "/OE" at 7141.94,3484.21 h98.43 r90
  text "/CS" at 7241.94,3484.21 h98.43 r90
  text "v03_RAM_ROM_4Plane" at 6875,3099.21 h120
Bottom Silkscreen Layer:
  drawing of 3046 lines, arcs and shapes, not listed
  text "v03_RAM_ROM_4Plane" at 5395,3829.21 h120